# Altium PCB 底板.PcbDoc
Units mil, origin at the board's own origin, x right, y up, seen from the top; angles counter-clockwise.
Board outline 3675 x 2750 mil, 2 copper layers (Top Layer, Bottom Layer); 28 components, 73 nets, 262 pads, 20 vias.
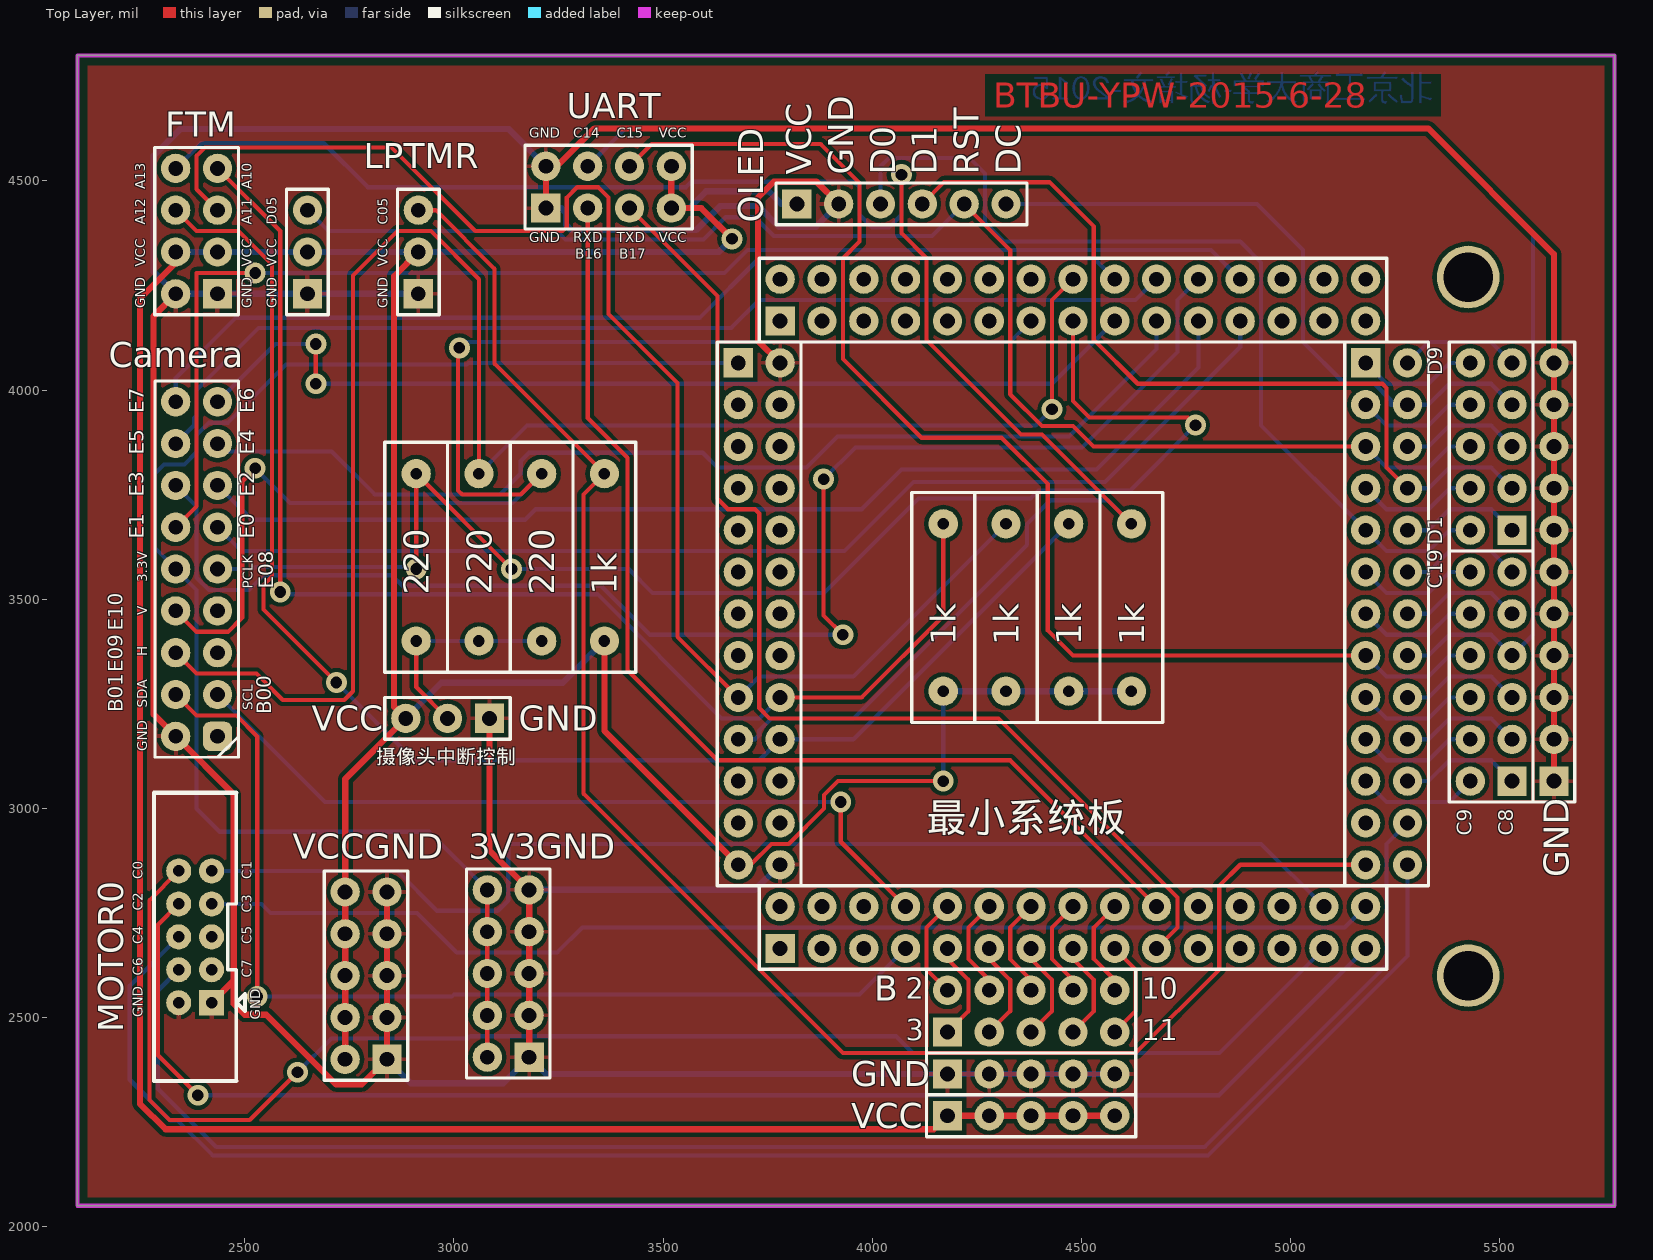
[diagram p0: Top Layer view]
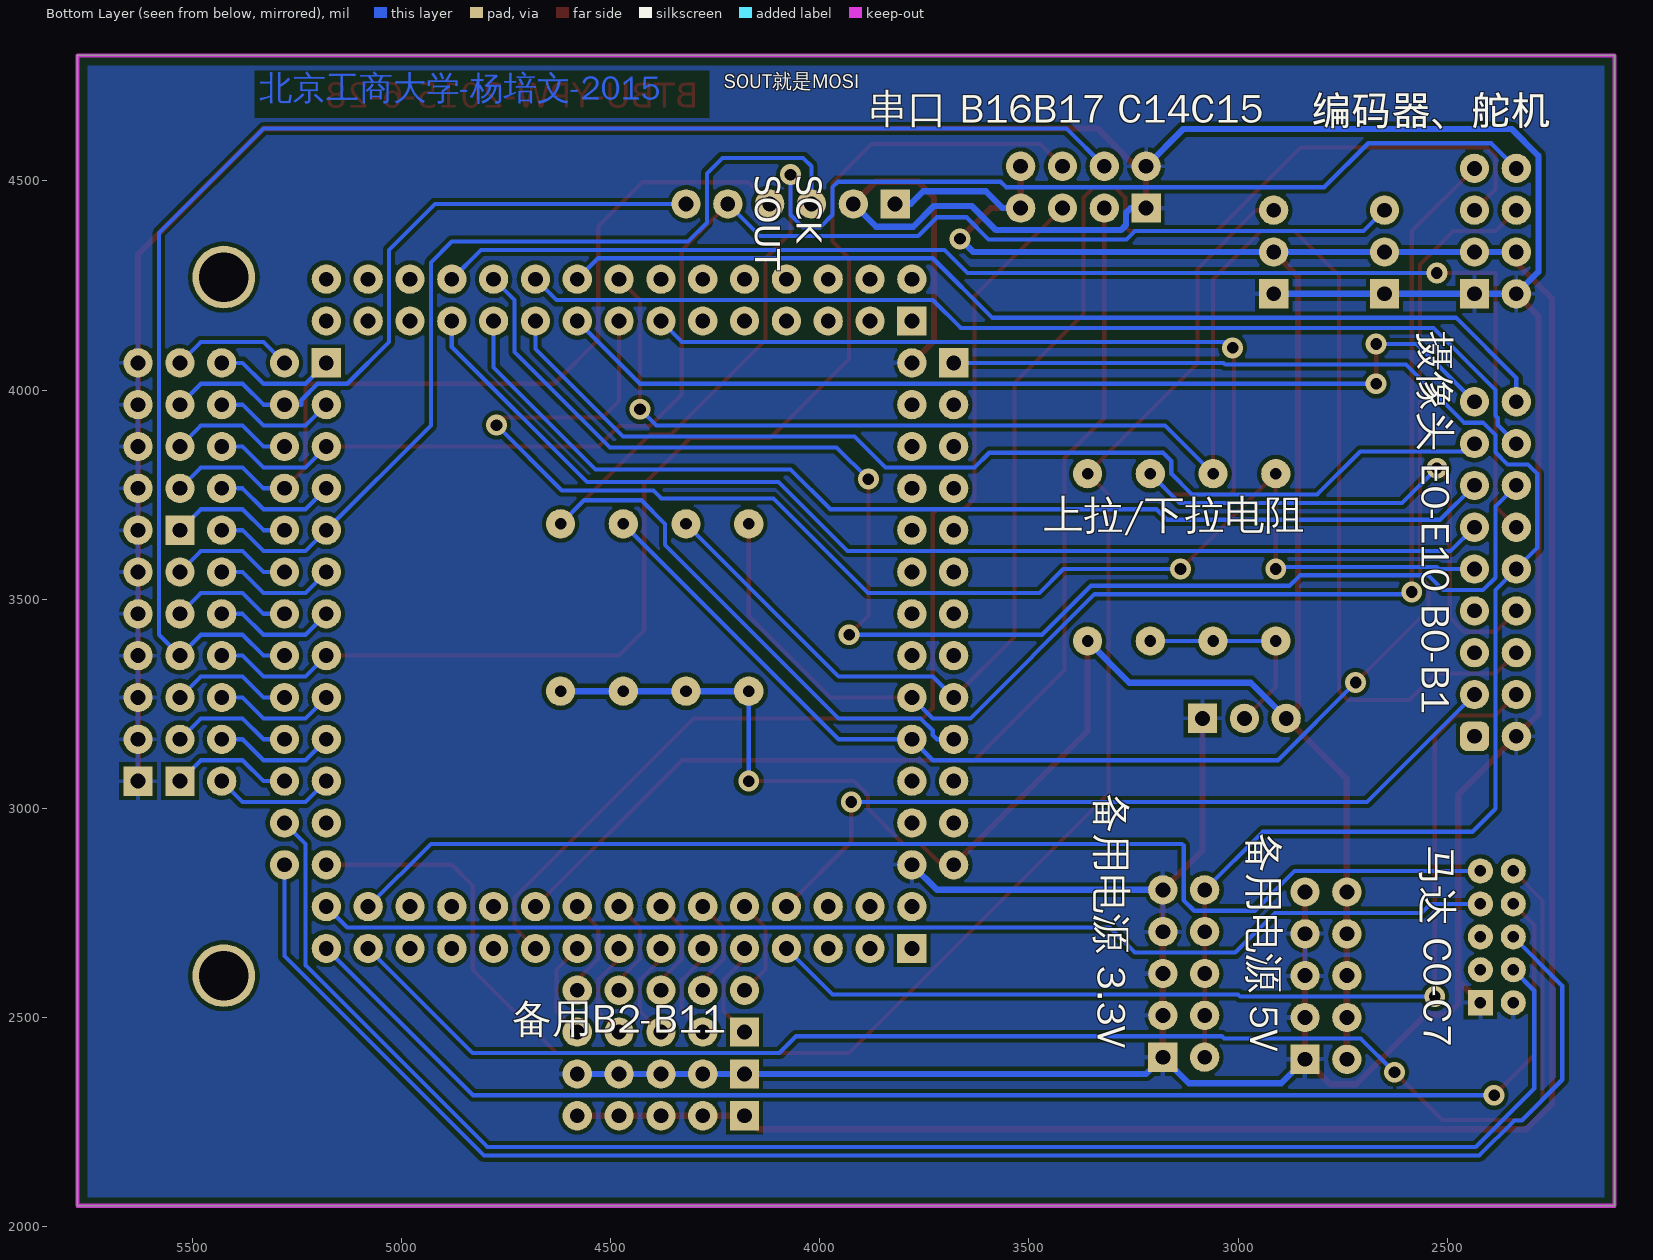
[diagram p1: Bottom Layer view, seen from below]

## Layer stack, top to bottom
Top Layer: signal copper 1.4
Dielectric: dielectric 12.6, FR-4, Dk 4.8
Bottom Layer: signal copper 1.4

## Board outline
2100,4800 2100,2050 5775,2050 5775,4800

## Design rules (kind name [scope] priority, off if disabled: settings)
Clearance [All] p1: gap=10
PolygonConnect [All] p1: connectstyle=Relief reliefconductorwidth=10 reliefentries=4 polygonreliefangle="90 Angle" airgapwidth=10
RoutingVias [All] p1: holewidth=28 width=50 viastyle="Through Hole" minholewidth=28 minwidth=50 maxholewidth=28 maxwidth=50
SolderMaskExpansion [All] p1: expansion=4
Width GND [InNet('GND')] p1: maxlimit=15 minlimit=10 preferedwidth=15
Width VCC [InNet('VCC')] p2: maxlimit=15 minlimit=10 preferedwidth=10
Width [All] p3: maxlimit=10 minlimit=10 preferedwidth=10
28 further rules are at their usual default settings.

## Components (designator, comment, footprint, x,y, rotation, side; value= is the part's Value field where it differs from the comment)
3V3GND "Comment" HDR2X5 3180,2405 r90 top
B "Comment" HDR2X5 4180,2465 r0 top
Camera "Comment" CCD-PZ 2275,3415 r90 top
FTM "Comment" HDR2X4#1 2435,4230 r90 top
GND "Comment" HDR1X5 4180,2365 r0 top
LPTMR "Comment" HDR1X3#1 2650,4230 r90 top
MOTOR0 "JTAG" IDC10S 2420,2535 r270 top
VCC "Comment" HDR1X5 4180,2265 r0 top
VCCGND "Comment" HDR2X5 2840,2400 r90 top
? "Comment" HDR1X11 5630,3065 r90 top
? "Comment" HDR1X6 3820,4445 r0 top
? "Comment" HDR1X3#2 3085,3215 r180 top
? "Comment" RAD-0.4#1 3360,3600 r90 top
? "Comment" HDR2X6 5530,3065 r90 top
? "Comment" HDR2X13#1 3680,4065 r270 top
? "Comment" HDR2X15#1 3780,4165 r0 top
? "Comment" HDR2X15#2 3780,2665 r0 top
? "Comment" HDR2X13#2 5180,4065 r270 top
? "Comment" HDR2X4#2 3220,4435 r0 top
? "Comment" HDR2X5 5530,3665 r90 top
? "Comment" HDR1X3#3 2915,4230 r90 top
? "Comment" RAD-0.4#2 2910,3600 r90 top
? "Comment" RAD-0.4#2 3060,3600 r90 top
? "Comment" RAD-0.4#1 3210,3600 r90 top
? "Comment" RAD-0.4#1 4170,3480 r90 top
? "Comment" RAD-0.4#1 4320,3480 r90 top
? "Comment" RAD-0.4#1 4470,3480 r90 top
? "Comment" RAD-0.4#1 4620,3480 r90 top

## Footprints (in the part's own frame and the unit in brackets; to place one, negate y for a bottom-side part, rotate by r counter-clockwise, add the part's x,y. Pads: shape width x height; smd on the part's side, far side on the other; paste and mask are expansions set on the pad)
CCD-PZ [mil] "2.54间距 18P"
  rrect50% 70x70 hole 35: 1(-243,-160)
  round 70 hole 35: 3.3(157,-60) 5(-43,-160) 7(57,-160) D1(257,-160) D2(257,-60) D3(357,-160) D4(357,-60) D5(457,-160) D6(457,-60) D7(557,-160) D8(557,-60) GND(-243,-60) HREF(-43,-60) PCLK(157,-160) SCL(-143,-160) SDA(-143,-60) VSYNC(57,-60)
  silkscreen extent -293,-210 607,-10
HDR1X3#1 [mil] "Connector; Header; 3 Position"
  rect 70x70 hole 35.43: GND(0,0)
  round 70 hole 35.43: VCC(100,0) ""(200,0)
  silkscreen extent -50,-50 250,50
HDR1X3#2 [mil] "Connector; Header; 3 Position"
  rect 70x70 hole 35.43: 1(0,0)
  round 70 hole 35.43: 2(100,0) 3(200,0)
  silkscreen extent -50,-50 250,50
HDR1X3#3 [mil] "Connector; Header; 3 Position"
  rect 70x70 hole 35.43: ""(0,0)
  round 70 hole 35.43: ""(100,0) ""(200,0)
  silkscreen extent -50,-50 250,50
HDR1X5 [mil] "Connector; Header; 5 Position"
  rect 70x70 hole 35.43: 1(0,0)
  round 70 hole 35.43: 2(100,0) 3(200,0) 4(300,0) 5(400,0)
  silkscreen extent -50,-50 450,50
HDR1X6 [mil] "Connector; Header; 6 Position"
  round 70 hole 35.43: 5(400,0) 6(500,0) D0(200,0) D1(300,0) GND(100,0)
  rect 70x70 hole 35.43: VCC(0,0)
  silkscreen extent -50,-50 550,50
HDR1X11 [mil] "Connector; Header; 11 Position"
  rect 70x70 hole 35.43: 1(0,0)
  round 70 hole 35.43: 2(100,0) 3(200,0) 4(300,0) 5(400,0) 6(500,0) 7(600,0) 8(700,0) 9(800,0) 10(900,0) 11(1000,0)
  silkscreen extent -50,-50 1050,50
HDR2X4#1 [mil] "Connector; Header; 4x2 Position"
  round 70 hole 35.43: A(200,0) A(200,100) B(300,0) B(300,100) GND(0,100) VCC(100,0) VCC(100,100)
  rect 70x70 hole 35.43: GND(0,0)
  silkscreen extent -50,-50 350,150
HDR2X4#2 [mil] "Connector; Header; 4x2 Position"
  rect 70x70 hole 35.43: 1(0,0)
  round 70 hole 35.43: 2(0,100) 3(100,0) 4(100,100) 5(200,0) 6(200,100) 7(300,0) 8(300,100)
  silkscreen extent -50,-50 350,150
HDR2X5 [mil] "Connector; Header; 5x2 Position"
  rect 70x70 hole 35.43: 1(0,0)
  round 70 hole 35.43: 2(0,100) 3(100,0) 4(100,100) 5(200,0) 6(200,100) 7(300,0) 8(300,100) 9(400,0) 10(400,100)
  silkscreen extent -50,-50 450,150
HDR2X6 [mil] "Connector; Header; 6x2 Position"
  rect 70x70 hole 35.43: 1(0,0)
  round 70 hole 35.43: 2(0,100) 3(100,0) 4(100,100) 5(200,0) 6(200,100) 7(300,0) 8(300,100) 9(400,0) 10(400,100) 11(500,0) 12(500,100)
  silkscreen extent -50,-50 550,150
HDR2X13#1 [mil] "Connector; Header; 13x2 Position"
  rect 70x70 hole 35.43: 3.3(0,0)
  round 70 hole 35.43: A4(500,100) A5(500,0) A6(600,100) A7(600,0) A8(700,100) A9(700,0) A10(800,100) A11(800,0) A12(900,100) A13(900,0) A14(1000,100) A15(1000,0) A16(1100,100) A17(1100,0) DAC0(100,100) DAC1(100,0) E24(200,0) E25(300,100) E26(300,0) E27(400,100) E28(400,0) GND(0,100) GND(1200,100) VBAT(200,100) VCC(1200,0)
  silkscreen extent -50,-50 1250,150
HDR2X13#2 [mil] "Connector; Header; 13x2 Position"
  round 70 hole 35.43: C4(1200,100) C5(1200,0) C6(1100,100) C7(1100,0) C8(1000,100) C9(1000,0) C10(900,100) C11(900,0) C12(800,100) C13(800,0) C14(700,100) C15(700,0) C16(600,100) C17(600,0) C18(500,100) C19(500,0) D0(400,100) D1(400,0) D2(300,100) D3(300,0) D4(200,100) D5(200,0) D6(100,100) D7(100,0) D8(0,100)
  rect 70x70 hole 35.43: D9(0,0)
  silkscreen extent -50,-50 1250,150
HDR2X15#1 [mil] "Connector; Header; 15x2 Position"
  round 70 hole 35.43: 0S16(0,100) AD0DM0(200,100) AD0DM1(400,100) AD0DP0(300,0) AD0DP1(500,0) AD1DM0(100,100) AD1DM1(300,100) AD1DP1(400,0) AD1DP6(200,0) AD1S16(100,0) D10(1400,0) D11(1400,100) D12(1300,0) D13(1300,100) D14(1200,0) D15(1200,100) E0(1100,0) E1(1100,100) E2(1000,0) E3(1000,100) E4(900,0) E5(900,100) E6(800,0) E7(800,100) E8(700,0) E9(700,100) E10(600,0) E11(600,100) E12(500,100)
  rect 70x70 hole 35.43: 1S16(0,0)
  silkscreen extent -50,-50 1450,150
HDR2X15#2 [mil] "Connector; Header; 15x2 Position"
  round 70 hole 35.43: A24(0,100) A26(100,100) A27(100,0) A28(200,100) A29(200,0) B0(300,100) B1(300,0) B2(400,100) B3(400,0) B4(500,100) B5(500,0) B6(600,100) B7(600,0) B8(700,100) B9(700,0) B10(800,100) B11(800,0) B16(900,100) B17(900,0) B18(1000,100) B19(1000,0) B20(1100,100) B21(1100,0) B22(1200,100) B23(1200,0) C0(1300,0) C1(1300,100) C2(1400,0) C3(1400,100)
  rect 70x70 hole 35.43: A25(0,0)
  silkscreen extent -50,-50 1450,150
IDC10S [mil]
  round 60 hole 27.56: 3(-78.96,0.86) 4(-78.96,-77.88) 5(-157.7,0.86) 6(-157.7,-77.88) 7(-236.44,0.86) 8(-236.44,-77.88) 9(-315.18,0.86) 10(-315.18,-77.88) GND(-0.22,-77.88)
  rect 60x60 hole 27.56: GND(-0.22,0.86)
  silkscreen extent -502,-137 187,80
RAD-0.4#1 [mil] "Radial Cap, Thru-Hole; 2 Leads; 0.4 in Pin Spacing"
  round 70 hole 27.56: 2(200,0) ""(-200,0)
  silkscreen extent -275,-75 275,75
RAD-0.4#2 [mil] "Radial Cap, Thru-Hole; 2 Leads; 0.4 in Pin Spacing"
  round 70 hole 27.56: 1(-200,0) 2(200,0)
  silkscreen extent -275,-75 275,75

## Part data
MOTOR0: library part MHDR2X5, "Header, 5-Pin, Dual row"

## Free pads (board coordinates)
  round 150 hole 118.11: 0(5425,2600) 0(5425,4270)

## Via types
v1: diameter 50, hole 28, Top Layer to Bottom Layer, 20 vias

## Nets (pads, with @x,y where several pads share a name; then routed paths per layer and width w, separated by ;. In a path a pad name is that pad's centre, name@x,y a point inside that pad or via, vN(x,y) a via of type N, cw(c..) or ccw(c..) an arc to the next point about the centre after c; other vN are vias at no path point)
3.3: 3V3GND.2 3V3GND.4 3V3GND.6 3V3GND.8 3V3GND.10 ?.3.3 Camera.3.3 | length 3546.8
  Top Layer w10: 3V3GND.2 3V3GND.4 3V3GND.6 3V3GND.8 3V3GND.10
  Bottom Layer w10: 3V3GND.10 2941,2944 2440,2944 2385,2999 2385,3522 Camera.3.3 2285,3622 2285,3800 2307,3822 2355.71,3822 2385,3851.29 2385,3892.71 2414.29,3922 2460,3922 2598.96,4060.96 3031,4060.96 3035.04,4065 ?.3.3
A4: ?.A4
A5: ?.A5
A6: ?.A6
A7: ?.A7
A8: ?.A8
A9: ?.A9
A10: ?.2@4170,3680 ?.A10 FTM.B@2435,4530 | length 3106.7
  Top Layer w10: FTM.B@2435,4530 2585,4380 v1(2585,3517) ; ?.A10 3975,3265 4170,3460 ?.2@4170,3680
  Bottom Layer w10: v1(2585,3517) 2590,3512 3343,3512 3640,3215 3730,3215 ?.A10
A11: ?.2@4320,3680 ?.A11 FTM.A@2435,4430 | length 3457
  Top Layer w10: FTM.A@2435,4430 2385,4480 2385,4560 2405,4580 2851,4580 3051,4380 3260,4380 3270,4390 3270,4460 3295,4485 3345,4485 3370,4460 3370,4182 3535,4017 3535,3410 ?.A11
  Bottom Layer w10: ?.A11 3730,3315 3955,3315 ?.2@4320,3680
A12: ?.2@4470,3680 ?.A12 FTM.A@2335,4430 | length 3425.3
  Top Layer w10: FTM.A@2335,4430 2385,4380 2485,4380 2565,4300 2565,3553.57 2545,3533.57 2545,3475 v1(2719,3301)
  Bottom Layer w10: v1(2719,3301) 2905,3115 3730,3115 ?.A12 3955,3165 ?.2@4470,3680
A13: ?.2@4620,3680 ?.A13 FTM.B@2335,4530 | length 4328.8
  Top Layer w10: v1(4070,4515) 4070,4375 4130,4315 4130,4120 4356,3894 4406,3894 ?.2@4620,3680
  Bottom Layer w10: FTM.B@2335,4530 2395,4590 2689,4590 2794,4485 3555,4485 3568,4498 3957,4498 3970,4485 3970,4419 4000,4389 4040,4389 4070,4419 v1(4070,4515) ; ?.A13 3720,3165 3730,3175 3730,3185.71 3759.29,3215 3955,3215 4370,3630 4370,3680 4426.5,3736.5 4563.5,3736.5 ?.2@4620,3680
A14: ?.A14
A15: ?.A15
A16: ?.A16
A17: ?.A17
B0: ?.B0 Camera.SCL | length 1910.7
  Top Layer w10: v1(3925,3015) 3925,2920 ?.B0
  Bottom Layer w10: Camera.SCL 2692,3015 v1(3925,3015)
B1: ?.B1 Camera.SDA | length 2456.1
  Top Layer w10: Camera.SDA 2385,3222 2480,3222 2530,3172 v1(2530,2550)
  Bottom Layer w10: v1(2530,2550) 2995,2550 3000,2555 3970,2555 ?.B1
B2: ?.B2 B.2 | length 241.4
  Top Layer w10: B.2 4130,2615 4130,2715 ?.B2
B3: ?.B3 B.1 | length 241.4
  Top Layer w10: B.1 4230,2515 4230,2590 4180,2640 ?.B3
B4: ?.B4 B.4 | length 241.4
  Top Layer w10: B.4 4280,2590 4230,2640 4230,2715 ?.B4
B5: ?.B5 B.3 | length 241.4
  Top Layer w10: B.3 4330,2515 4330,2590 4280,2640 ?.B5
B6: ?.B6 B.6 | length 241.4
  Top Layer w10: B.6 4380,2590 4330,2640 4330,2715 ?.B6
B7: ?.B7 B.5 | length 241.4
  Top Layer w10: B.5 4430,2515 4430,2590 4380,2640 ?.B7
B8: ?.B8 B.8 | length 241.4
  Top Layer w10: B.8 4480,2590 4430,2640 4430,2715 ?.B8
B9: ?.B9 B.7 | length 241.4
  Top Layer w10: B.7 4530,2515 4530,2590 4480,2640 ?.B9
B10: ?.B10 B.10 | length 241.4
  Top Layer w10: B.10 4580,2590 4530,2640 4530,2715 ?.B10
B11: ?.B11 B.9 | length 241.4
  Top Layer w10: B.9 4630,2515 4630,2615 ?.B11
B16: ?.3@3320,4435 ?.B16 | length 2643.4
  Top Layer w10: ?.3@3320,4435 3320,3933 3415,3838 3415,3330 3630,3115 4330,3115 ?.B16
B17: ?.5@3420,4435 ?.B17 | length 2691.8
  Top Layer w10: ?.5@3420,4435 3630,4225 3630,3740 3655,3715 3720,3715 3730,3705 3730,3240 3755,3215 4302,3215 4730,2787 4730,2715 ?.B17
C0: ?.C0 MOTOR0.10 | length 3607.1
  Top Layer w10: MOTOR0.10 2272,2780.06 2272,2303 2320,2255 2512,2255 v1(2626,2369)
  Bottom Layer w10: v1(2626,2369) 2707,2450 3034,2450 3039,2455 4057,2455 4097,2415 4830,2415 ?.C0
C1: ?.C1 MOTOR0.9 | length 2903.7
  Bottom Layer w10: MOTOR0.9 2864.82,2850.18 2960,2755 3105,2755 3130,2780 3130,2911 3134,2915 4930,2915 ?.C1
C2: ?.C2 MOTOR0.8 | length 3455.4
  Top Layer w10: MOTOR0.8 2292,2721.32 2292,2410 v1(2388,2314)
  Bottom Layer w10: v1(2388,2314) 4829,2314 ?.C2
C3: ?.C3 MOTOR0.7 | length 2852.9
  Bottom Layer w10: MOTOR0.7 2540,2771.44 2561.44,2750 2912,2750 3007,2655 3247,2655 3307,2715 5130,2715 ?.C3
C4: ?.C4 MOTOR0.6 | length 3935.9
  Bottom Layer w10: MOTOR0.6 2225,2575.58 2225,2351 2322,2254 2339.72,2254 2423.72,2170 4803.28,2170 5280,2646.72 ?.C4
C5: ?.2@3360,3800 ?.@2915,4430 ?.C5 | length 4054.9
  Top Layer w10: ?.@2915,4430 2956.85,4430 3097,4289.85 3097,4063 3360,3800 3310,3750 3310,3035 3930,2415 4630,2415 4830,2615 4830,2815 4880,2865 ?.C5
C6: ?.C6 MOTOR0.4 | length 3841.6
  Bottom Layer w10: MOTOR0.4 2292,2563.84 2292,2330 2432,2190 4795,2190 5230,2625 5230,2915 ?.C6
C7: MOTOR0.3
C8: ?.1@5530,3065 ?.C8 | length 291.4
  Bottom Layer w10: ?.C8 5330,3065 5380,3115 5480,3115 ?.1@5530,3065
C9: ?.2@5430,3065 ?.C9 | length 291.4
  Bottom Layer w10: ?.C9 5230,3015 5380,3015 ?.2@5430,3065
C10: ?.3@5530,3165 ?.C10 | length 291.4
  Bottom Layer w10: ?.C10 5330,3165 5380,3215 5480,3215 ?.3@5530,3165
C11: ?.4@5430,3165 ?.C11 | length 291.4
  Bottom Layer w10: ?.C11 5230,3115 5330,3115 5380,3165 ?.4@5430,3165
C12: ?.5@5530,3265 ?.C12 | length 291.4
  Bottom Layer w10: ?.C12 5330,3265 5380,3315 5480,3315 ?.5@5530,3265
C13: ?.6@5430,3265 ?.C13 | length 291.4
  Bottom Layer w10: ?.C13 5230,3215 5330,3215 5380,3265 ?.6@5430,3265
C14: ?.4@3320,4535 ?.7@5530,3365 ?.C14 | length 3723
  Bottom Layer w10: ?.4@3320,4535 3410,4625 5330,4625 5580,4375 5580,3415 5530,3365 5480,3415 5380,3415 5330,3365 ?.C14
C15: ?.6@3420,4535 ?.8@5430,3365 ?.C15 | length 3088.2
  Top Layer w10: ?.6@3420,4535 3473,4588 3877,4588 3970,4495 3970,4355 3930,4315 3930,4074 4118.09,3885.91 4309.09,3885.91 4420,3775 4420,3425 4480,3365 ?.C15
  Bottom Layer w10: ?.C15 5230,3315 5330,3315 5380,3365 ?.8@5430,3365
C16: ?.9@5530,3465 ?.C16 | length 291.4
  Bottom Layer w10: ?.C16 5330,3465 5380,3515 5480,3515 ?.9@5530,3465
C17: ?.10@5430,3465 ?.C17 | length 291.4
  Bottom Layer w10: ?.C17 5230,3415 5330,3415 5380,3465 ?.10@5430,3465
C18: ?.11@5530,3565 ?.C18 | length 291.4
  Bottom Layer w10: ?.C18 5330,3565 5380,3615 5480,3615 ?.11@5530,3565
C19: ?.12 ?.C19 | length 291.4
  Bottom Layer w10: ?.C19 5230,3515 5330,3515 5380,3565 ?.12
CAMPULL: ?.1@2910,3400 ?.1@3060,3400 ?.2@2985,3215 ?.@3210,3400 | length 516.1
  Top Layer w10: ?.1@2910,3400 2910,3290 ?.2@2985,3215
  Bottom Layer w10: ?.1@2910,3400 3060,3400 ?.@3210,3400
D0: ?.1@5530,3665 ?.D0@5280,3665 | length 291.4
  Bottom Layer w10: ?.D0@5280,3665 5330,3665 5380,3715 5480,3715 ?.1@5530,3665
D1: ?.2@5430,3665 ?.D0@4020,4445 ?.D1@5180,3665 | length 2215.9
  Bottom Layer w10: ?.D0@4020,4445 4020,4535 4040,4555 4233,4555 4270,4518 4270,4400 4315,4355 4880,4355 4930,4305 4930,3915 5180,3665 5230,3615 5330,3615 5380,3665 ?.2@5430,3665
D2: ?.3@5530,3765 ?.D1@4120,4445 ?.D2 | length 2046.2
  Top Layer w10: ?.D1@4120,4445 4172,4497 4424,4497 4530,4391 4530,4120 4635,4015 5220,4015 5230,4005 5230,3815 ?.D2
  Bottom Layer w10: ?.D2 5330,3765 5380,3815 5480,3815 ?.3@5530,3765
D3: ?.4@5430,3765 ?.D3 | length 291.4
  Bottom Layer w10: ?.D3 5230,3715 5330,3715 5380,3765 ?.4@5430,3765
D4: ?.5@5530,3865 ?.D4 | length 291.4
  Bottom Layer w10: ?.D4 5330,3865 5380,3915 5480,3915 ?.5@5530,3865
D5: ?.5@4220,4445 ?.6@5430,3865 ?.D5 LPTMR. | length 3365.1
  Top Layer w10: ?.5@4220,4445 4330,4335 4330,3990 4406,3914 4480,3914 4529,3865 ?.D5
  Bottom Layer w10: LPTMR. 2700,4380 3247,4380 3267,4360 3596.72,4360 3649.72,4413 3720,4413 3764.83,4368.17 4143.17,4368.17 ?.5@4220,4445 ; ?.D5 5230,3815 5330,3815 5380,3865 ?.6@5430,3865
D6: ?.6@4320,4445 ?.7@5530,3965 ?.D6 | length 1585.4
  Bottom Layer w10: ?.6@4320,4445 4920,4445 5030,4335 5030,4115 5130,4015 5200.71,4015 5240,3975.71 5240,3965 ?.D6 5330,3965 5380,4015 5480,4015 ?.7@5530,3965
D7: ?.8@5430,3965 ?.D7 | length 291.4
  Bottom Layer w10: ?.D7 5230,3915 5330,3915 5380,3965 ?.8@5430,3965
D8: ?.9@5530,4065 ?.D8 | length 291.4
  Bottom Layer w10: ?.D8 5330,4115 5480,4115 ?.9@5530,4065
D9: ?.10@5430,4065 ?.D9 | length 291.4
  Bottom Layer w10: ?.D9 5230,4015 5330,4015 5380,4065 ?.10@5430,4065
E0: ?.E0 Camera.D1 | length 2732.7
  Bottom Layer w10: Camera.D1 2492,3615 3934,3615 4099,3780 4557,3780 4880,4103 ?.E0
E1: ?.E1 Camera.D2 | length 3175.5
  Top Layer w10: Camera.D2 2385,3722 2385,4280 v1(2525,4280)
  Bottom Layer w10: v1(2525,4280) 3647,4280 3702,4335 4810,4335 ?.E1
E2: ?.E2 Camera.D3 | length 2640.9
  Bottom Layer w10: Camera.D3 2517,3690 3170,3690 3195,3715 3975,3715 4070,3810 4536.35,3810 4780,4053.65 ?.E2
E3: ?.E3 Camera.D4 | length 3429.6
  Top Layer w10: v1(3884,3787) 3884,3461 v1(3930,3415)
  Bottom Layer w10: Camera.D4 2385,3722 2385,3551.29 2414.29,3522 2510,3522 2545,3557 2852,3557 2877,3532 3352,3532 3469,3415 v1(3930,3415) ; v1(3884,3787) 3960,3863 4502,3863 4730,4091 4730,4215 ?.E3
E4: ?.E4 Camera.D5 | length 2553.2
  Bottom Layer w10: Camera.D5 2454,3853 2708,3853 2811,3750 3110,3750 3160,3800 3160,3830 3180,3850 3595,3850 3630,3815 3843.39,3815 3917.39,3889 4471,3889 4680,4098 ?.E4
E5: ?.E5 Camera.D6 | length 2553.5
  Bottom Layer w10: Camera.D6 2379.39,3916.39 2379.39,3933.01 2385,3938.62 2385,4000 2533,4148 3663,4148 3730,4215 4630,4215 ?.E5
E6: ?.E6 Camera.D7 | length 2359.3
  Top Layer w10: v1(2670,4015) v1(2670,4110)
  Bottom Layer w10: Camera.D7 2573,4110 v1(2670,4110) ; v1(2670,4015) 4430,4015 ?.E6
E7: ?.E7 Camera.D8 | length 2440.9
  Bottom Layer w10: Camera.D8 2335,4028.51 2479.49,4173 3588,4173 3730,4315 4530,4315 ?.E7
E8: ?.2@2910,3800 ?.E8 Camera.PCLK | length 3362.3
  Top Layer w10: v1(2910,3572) 2910,3800 v1(3138,3572) ; ?.E8 4480,3974 4520,3934 4755,3934 v1(4773,3916)
  Bottom Layer w10: Camera.PCLK 2520,3572 2525,3577 2905,3577 v1(2910,3572) ; v1(3138,3572) 3418,3572 3475,3515 3885,3515 4111,3741 4379,3741 4398,3760 4617,3760 v1(4773,3916)
E9: ?.2@3060,3800 ?.E9 Camera.HREF | length 4096.5
  Top Layer w10: Camera.HREF 2385,3322 2528,3322 2591,3259 2738,3259 2759,3280 2759,4274 2865,4380 2945,4380 3060,4265 ?.2@3060,3800 ; v1(4430,3954) 4430,4215 ?.E9
  Bottom Layer w10: ?.2@3060,3800 3175,3915 4391,3915 v1(4430,3954)
E10: ?.2@3210,3800 ?.E10 Camera.VSYNC | length 3272.6
  Top Layer w10: Camera.VSYNC 2385,3422 2460,3422 2494,3456 2494,3782 v1(2525,3813) ; v1(3013,4101) 3010,4098 3010,3760 3020,3750 3160,3750 ?.2@3210,3800
  Bottom Layer w10: v1(2525,3813) 2608,3730 3140,3730 ?.2@3210,3800 ; v1(3013,4101) 3027,4115 4330,4115 ?.E10
GND: 3V3GND.1 3V3GND.3 3V3GND.5 3V3GND.7 3V3GND.9 ?.1@3085,3215 ?.1@3220,4435 ?.1@5630,3065 ?.2@3220,4535 ?.2@5630,3165 ?.3@5630,3265 ?.4@5630,3365 ?.5@5630,3465 ?.6@5630,3565 ?.7@5630,3665 ?.8@5630,3765 ?.9@5630,3865 ?.10@5630,3965 ?.11@5630,4065 ?.@2915,4230 ?.GND Camera.GND FTM.GND GND.1 GND.2 GND.3 GND.4 GND.5 LPTMR.GND MOTOR0.GND VCCGND.1 VCCGND.3 VCCGND.5 VCCGND.7 VCCGND.9 | length 13343.4
  Top Layer w15: FTM.GND@2335,4230 2282,4177 2282,3225 Camera.GND 2474,3033 2474,2588.36 ; MOTOR0.GND@2420.86,2535.22 2474,2588.36 ; VCCGND.9 VCCGND.7 VCCGND.5 VCCGND.3 VCCGND.1 2780,2340 2718.09,2340 2551.42,2506.67 2500,2506.67 2474,2532.67 2474,2588.36 ; ?.1@3085,3215 3085,2900 3V3GND.9 3V3GND.7 3V3GND.5 3V3GND.3 3V3GND.1 ; ?.1@3220,4435 3220,4535 3245.75,4535 3336.25,4625.5 5329.5,4625.5 5630,4325 5630,4065 5630,3965 5630,3865 5630,3765 5630,3665 5630,3565 5630,3465 5630,3365 5630,3265 5630,3165 ?.1@5630,3065 ; ?.GND@3780,4065 3727,4118 3727,4460 3765,4498 3867,4498 ?.GND@3920,4445
  Bottom Layer w15: VCCGND.1 2897,2343 3118,2343 3V3GND.1 3220,2365 GND.1 GND.2 GND.3 GND.4 GND.5 ; ?.@2915,4230 LPTMR.GND 2435,4230 2335,4230 2282,4283 2282,4560 2346,4624 3131,4624 ?.2@3220,4535 ; 3V3GND.9 3720,2805 ?.GND@3780,2865 ; ?.1@3220,4435 3257,4435 3268,4424 3268,4394.5 3280,4382.5 3578.96,4382.5 3636.46,4440 3727.5,4440 3776.83,4390.67 3865.67,4390.67 ?.GND@3920,4445
VCC: ?.3@2885,3215 ?.7@3520,4435 ?.8@3520,4535 ?.@2915,4330 ?.@3360,3400 ?.@4170,3280 ?.@4320,3280 ?.@4470,3280 ?.@4620,3280 ?.VCC FTM.VCC LPTMR.VCC VCC.1 VCC.2 VCC.3 VCC.4 VCC.5 VCCGND.2 VCCGND.4 VCCGND.6 VCCGND.8 VCCGND.10 | length 10890.6
  Top Layer w10: ?.VCC@3680,2865 3709.29,2865 3759.29,2915 3800.71,2915 3885,2999.29 3885,3031.57 3918.43,3065 v1(4170,3065)
  Top Layer w15: FTM.VCC@2335,4330 2335,4304.25 2249.5,4218.75 2249.5,2293.68 2310.68,2232.5 4147.5,2232.5 VCC.1 VCC.2 VCC.3 VCC.4 VCC.5 ; VCCGND.2 VCCGND.4 VCCGND.6 VCCGND.8 VCCGND.10 2740,3070 2885,3215 2857,3243 2857,4272 ?.@2915,4330 ; ?.@3360,3400 3360,3185 ?.VCC@3680,2865 ; ?.8@3520,4535 3520,4435 3591.46,4435 v1(3665,4361.46)
  Bottom Layer w10: v1(4170,3065) ?.@4170,3280
  Bottom Layer w15: FTM.VCC@2335,4330 2435,4330 LPTMR.VCC 2915,4330 3633.54,4330 v1(3665,4361.46) ; ?.3@2885,3215 2970,3300 3260,3300 ?.@3360,3400 ; ?.7@3520,4435 3562.5,4435 3603,4475.5 3752.5,4475.5 3783,4445 ?.VCC@3820,4445 ; ?.@4170,3280 4320,3280 4470,3280 ?.@4620,3280
pads on no net: ?.0S16 ?.1S16 ?.A24 ?.A25 ?.A26 ?.A27 ?.A28 ?.A29 ?.AD0DM0 ?.AD0DM1 ?.AD0DP0 ?.AD0DP1 ?.AD1DM0 ?.AD1DM1 ?.AD1DP1 ?.AD1DP6 ?.AD1S16 ?.B18 ?.B19 ?.B20 ?.B21 ?.B22 ?.B23 ?.C7 ?.D10 ?.D11 ?.D12 ?.D13 ?.D14 ?.D15 ?.DAC0 ?.DAC1 ?.E11 ?.E12 ?.E24 ?.E25 ?.E26 ?.E27 ?.E28 ?.VBAT Camera.1 Camera.5 Camera.7 MOTOR0.5

## Polygon pours and split planes (outlines as drawn)
GND on Top Layer "Top Layer-No Net" (solid, pour order 2): 5750,2070 5750,4775 2125,4775 2125,2070
GND on Bottom Layer "Top Layer-No Net" (solid, pour order 4): 2125,2070 5750,2070 5750,4775 2125,4775

## Keep-outs
Keep-Out Layer:
  the board outline again, w10

## Other copper
Top Layer:
  text "BTBU-YPW-2015-6-28" at 4290,4675 h60
Bottom Layer:
  text "北京工商大学-杨培文-2015" at 5340,4675 h100

## Silkscreen, mask and mechanical layers (free items; w line width, h text height)
Top Overlay:
  text "UART" at 3270,4650 h60
  text "GND" at 3180,4595 h40
  text "C14" at 3285,4595 h40
  text "C15" at 3390,4595 h40
  text "VCC" at 3490,4595 h40
  text "VCC" at 3855,4515 h60 r90
  text "GND" at 3955,4515 h60 r90
  text "D0" at 4055,4515 h60 r90
  text "D1" at 4155,4515 h60 r90
  text "RST" at 4255,4515 h60 r90
  text "DC" at 4355,4515 h60 r90
  text "A13" at 2270,4480 h40 r90
  text "A10" at 2525,4480 h40 r90
  text "OLED" at 3740,4400 h60 r90
  text "A12" at 2270,4395 h40 r90
  text "A11" at 2525,4395 h40 r90
  text "D05" at 2585,4395 h40 r90
  text "C05" at 2850,4395 h40 r90
  text "GND" at 3180,4345 h40
  text "RXD" at 3285,4345 h40
  text "TXD" at 3390,4345 h40
  text "VCC" at 3490,4345 h40
  text "B16" at 3290,4305 h40
  text "B17" at 3395,4305 h40
  text "VCC" at 2270,4295 h40 r90
  text "VCC" at 2525,4295 h40 r90
  text "VCC" at 2585,4295 h40 r90
  text "VCC" at 2850,4295 h40 r90
  text "GND" at 2270,4195 h40 r90
  text "GND" at 2525,4195 h40 r90
  text "GND" at 2585,4195 h40 r90
  text "GND" at 2850,4195 h40 r90
  text "D9" at 5375,4035 h60 r90
  text "E7" at 2270,3945 h60 r90
  text "E6" at 2535,3945 h60 r90
  text "E5" at 2270,3845 h60 r90
  text "E4" at 2535,3845 h60 r90
  text "E3" at 2270,3745 h60 r90
  text "E2" at 2535,3745 h60 r90
  text "E1" at 2270,3645 h60 r90
  text "E0" at 2535,3645 h60 r90
  text "D1" at 5375,3630 h60 r90
  text "E08" at 2580,3525 h60 r90
  text "C19" at 5375,3525 h60 r90
  text "220" at 2940,3510 h60 r90
  text "220" at 3090,3510 h60 r90
  text "220" at 3240,3510 h60 r90
  text "1k" at 3390,3510 h60 r90
  text "E10" at 2220,3425 h60 r90
  text "1k" at 4200,3390 h60 r90
  text "1k" at 4350,3390 h60 r90
  text "1k" at 4500,3390 h60 r90
  text "1k" at 4650,3390 h60 r90
  text "E09" at 2220,3325 h60 r90
  text "B01" at 2220,3230 h60 r90
  text "B00" at 2575,3225 h60 r90
  text "VCC" at 2660,3185 h60
  text "GND" at 3155,3185 h60
  text "摄像头中断控制" at 2815,3095 h60
  text "C9" at 5445,2935 h60 r90
  text "C8" at 5545,2935 h60 r90
  text "最小系统板" at 4130,2920 h120
  text "GND" at 5665,2835 h60 r90
  text "C0" at 2265,2830 h40 r90
  text "C1" at 2525,2830 h40 r90
  text "C2" at 2265,2755 h40 r90
  text "C3" at 2525,2750 h40 r90
  text "C4" at 2265,2675 h40 r90
  text "C5" at 2525,2675 h40 r90
  text "C6" at 2265,2600 h40 r90
  text "C7" at 2525,2595 h40 r90
  text "GND" at 2265,2500 h40 r90
  text "GND" at 2545,2495 h40 r90
Bottom Overlay:
  text "SOUT就是MOSI" at 4230,4710 h60
  text "串口 B16B17 C14C15" at 3885,4615 h120
  text "编码器、舵机" at 2825,4610 h120
  text "SCK" at 4055,4515 h60 r90
  text "SOUT" at 4155,4515 h60 r90
  text "摄像头 E0-E10 B0-B1" at 2585,4140 h120 r90
  text "上拉/下拉电阻" at 3465,3645 h120
  text "备用电源 3.3V" at 3360,3035 h120 r90
  text "备用电源 5V" at 2995,2940 h120 r90
  text "马达 C0-C7" at 2580,2910 h120 r90
  text "备用B2-B11" at 4735,2440 h120

## Text inside footprints (layer, text, board x,y; h text height)
B: Top Overlay "10" at 4645,2545 h50; Top Overlay "11" at 4645,2445 h50; Top Overlay "3" at 4080,2445 h50; Top Overlay "2" at 4080,2545 h50
Camera: Top Overlay "PCLK" at 2528,3525 h40 r90; Top Overlay "3.3V" at 2275,3541 h40 r90; Top Overlay "V" at 2275.43,3461 h40 r90; Top Overlay "H" at 2275.43,3363 h40 r90; Top Overlay "SCL" at 2528,3234 h40 r90; Top Overlay "SDA" at 2275,3241 h40 r90; Top Overlay "GND" at 2275,3137 h40 r90